# Altium PCB MB_v1.PcbDoc (part 2 of 10)
Units mm, origin at the board's own origin, x right, y up, seen from the top; angles counter-clockwise.
Board outline 203 x 72 mm, 6 copper layers (Top Layer, Layer 3, Layer 1, Layer 2, Layer 4, Bottom Layer), stack 1.52 mm thick; 655 components, 569 nets, 2943 pads, 1834 vias.
Unrouted connection lines stored in the file: 31.
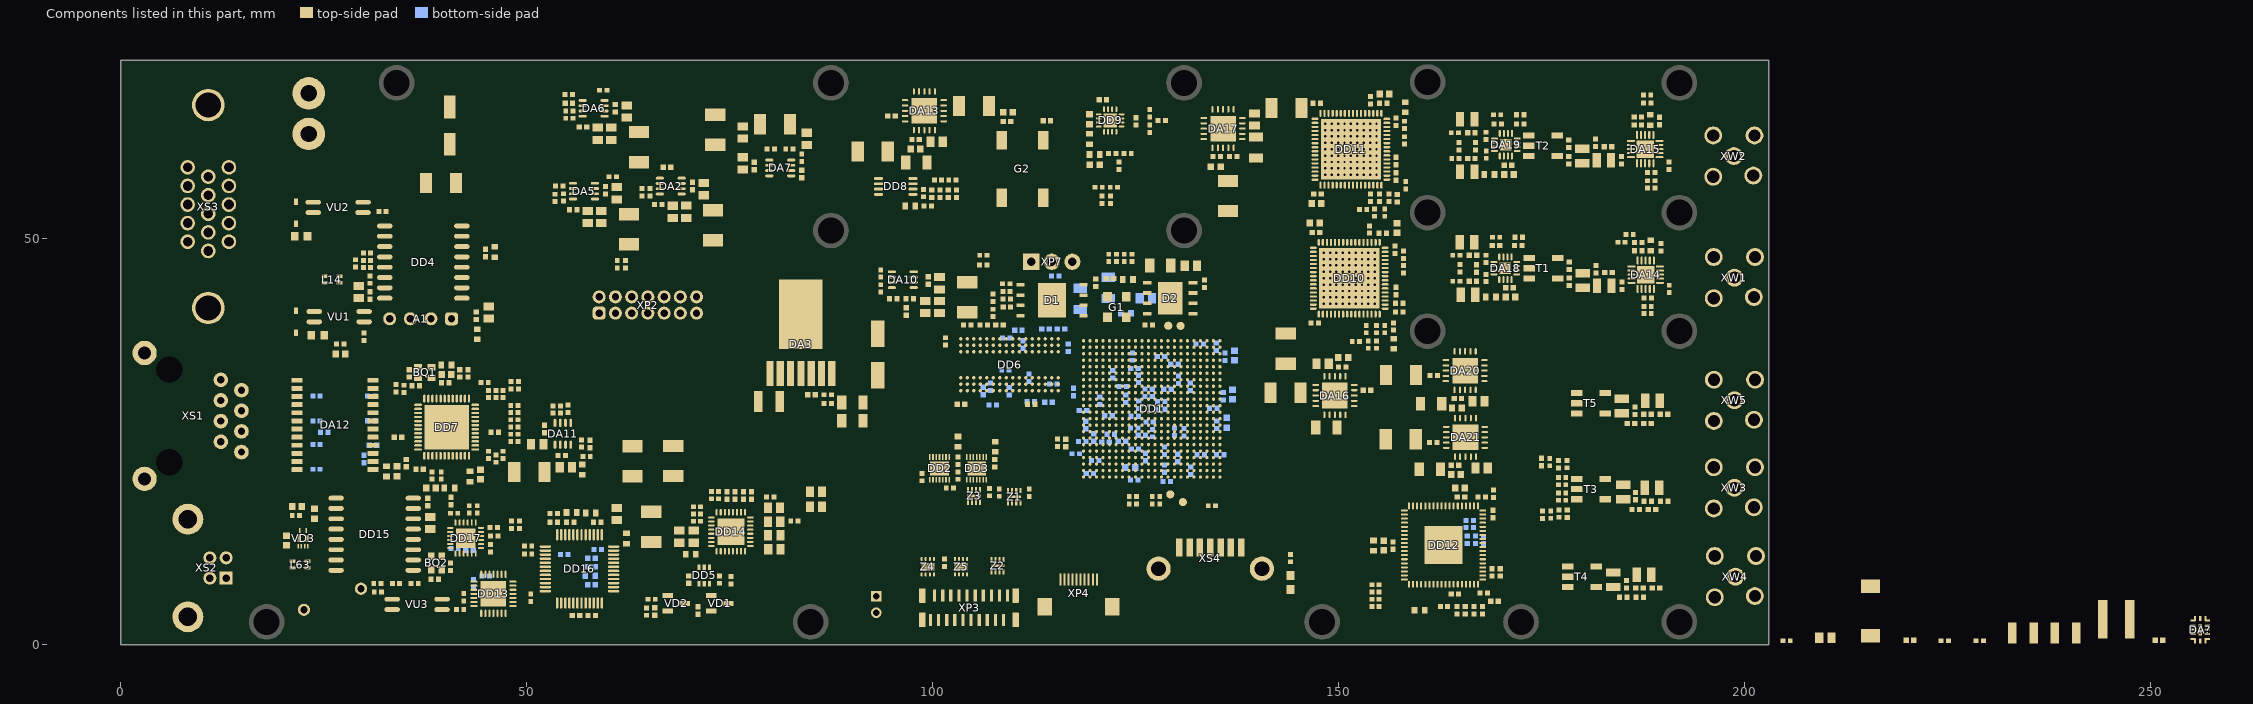
[diagram p6: the components of this part, seen from the top]

## Components (designator, comment, footprint, x,y, rotation, side; value= is the part's Value field where it differs from the comment) (continued)
XS4 "KLS1-SATA001" KLS1-SATA001 134.22,11.95 r0 top
XW1 "SMA-JR" SMA-JR 198.785,45.199 r90 top
XW2 "SMA-JR" SMA-JR 198.717,60.174 r90 top
XW3 "SMA-JR" SMA-JR 198.78,19.304 r90 top
XW4 "SMA-JR" SMA-JR 198.905,8.369 r90 top
XW5 "SMA-JR" SMA-JR 198.793,30.086 r90 top
Z1 "EClamp2394P" SON50P160X65_HS-9N 110.075,18.21 r90 top
Z2 "EClamp2394P" SON50P160X65_HS-9N 108.025,9.69 r90 top
Z3 "EClamp2394P" SON50P160X65_HS-9N 105.125,18.3 r90 top
Z4 "NUF4220MN" QFN50P200X200X80_HS-9L 99.425,9.6 r270 top
Z5 "NUF4220MN" QFN50P200X200X80_HS-9L 103.525,9.6 r270 top

## Footprints (in the part's own frame and the unit in brackets; to place one, negate y for a bottom-side part, rotate by r counter-clockwise, add the part's x,y. Pads: shape width x height; smd on the part's side, far side on the other; paste and mask are expansions set on the pad)
749020023A [mm] "24-Leads, Body 15,1x17,1mm, Pitch 1mm"
  rrect20% 1.35x0.6 smd: 1(-4.675,5.5) 2(-4.675,4.5) 3(-4.675,3.5) 4(-4.675,2.5) 5(-4.675,1.5) 6(-4.675,0.5) 7(-4.675,-0.5) 8(-4.675,-1.5) 9(-4.675,-2.5) 10(-4.675,-3.5) 11(-4.675,-4.5) 12(-4.675,-5.5) 13(4.675,-5.5) 14(4.675,-4.5) 15(4.675,-3.5) 16(4.675,-2.5) 17(4.675,-1.5) 18(4.675,-0.5) 19(4.675,0.5) 20(4.675,1.5) 21(4.675,2.5) 22(4.675,3.5) 23(4.675,4.5) 24(4.675,5.5)
  silkscreen extent -4.82,-7.55 3.55,7.55, body extent -5,-7.55 5,7.55, height 4
"ABRACOM ABM10" [mm] "Quartz Crystal, SM; Body 2.5 x 2.0 mm (LxW max)"
  rect 0.95x0.8 smd: 1(-0.825,-0.65) 2(0.825,-0.65) 3(0.825,0.65) 4(-0.825,0.65)
  silkscreen extent -1.32,-1.78 -1.07,-1.53, body extent -1.3,-1.03 1.3,1.08, height 0.7
BGA96C80P9X16_800X1400X110 [mm] "BGA, 96-Leads, Body 8,00x14,00mmx1,10mm, Pitch 0,80mm"
  round 0.42 smd mask+0.07: A1(-3.2,6) A2(-2.4,6) A3(-1.6,6) A7(1.6,6) A8(2.4,6) A9(3.2,6) B1(-3.2,5.2) B2(-2.4,5.2) B3(-1.6,5.2) B7(1.6,5.2) B8(2.4,5.2) B9(3.2,5.2) C1(-3.2,4.4) C2(-2.4,4.4) C3(-1.6,4.4) C7(1.6,4.4) C8(2.4,4.4) C9(3.2,4.4) D1(-3.2,3.6) D2(-2.4,3.6) D3(-1.6,3.6) D7(1.6,3.6) D8(2.4,3.6) D9(3.2,3.6) E1(-3.2,2.8) E2(-2.4,2.8) E3(-1.6,2.8) E7(1.6,2.8) E8(2.4,2.8) E9(3.2,2.8) F1(-3.2,2) F2(-2.4,2) F3(-1.6,2) F7(1.6,2) F8(2.4,2) F9(3.2,2) G1(-3.2,1.2) G2(-2.4,1.2) G3(-1.6,1.2) G7(1.6,1.2) G8(2.4,1.2) G9(3.2,1.2) H1(-3.2,0.4) H2(-2.4,0.4) H3(-1.6,0.4) H7(1.6,0.4) H8(2.4,0.4) H9(3.2,0.4) J1(-3.2,-0.4) J2(-2.4,-0.4) J3(-1.6,-0.4) J7(1.6,-0.4) J8(2.4,-0.4) J9(3.2,-0.4) K1(-3.2,-1.2) K2(-2.4,-1.2) K3(-1.6,-1.2) K7(1.6,-1.2) K8(2.4,-1.2) K9(3.2,-1.2) L1(-3.2,-2) L2(-2.4,-2) L3(-1.6,-2) L7(1.6,-2) L8(2.4,-2) L9(3.2,-2) M1(-3.2,-2.8) M2(-2.4,-2.8) M3(-1.6,-2.8) M7(1.6,-2.8) M8(2.4,-2.8) M9(3.2,-2.8) N1(-3.2,-3.6) N2(-2.4,-3.6) N3(-1.6,-3.6) N7(1.6,-3.6) N8(2.4,-3.6) N9(3.2,-3.6) P1(-3.2,-4.4) P2(-2.4,-4.4) P3(-1.6,-4.4) P7(1.6,-4.4) P8(2.4,-4.4) P9(3.2,-4.4) R1(-3.2,-5.2) R2(-2.4,-5.2) R3(-1.6,-5.2) R7(1.6,-5.2) R8(2.4,-5.2) R9(3.2,-5.2) T1(-3.2,-6) T2(-2.4,-6) T3(-1.6,-6) T7(1.6,-6) T8(2.4,-6) T9(3.2,-6)
  silkscreen extent -4,-7 4,7, body extent -4,-7 4,7, height 1.1
BGA484C80P22X22_1900X1900X160 [mm] "BGA, 484-Leads, Body 19,00x19,00mmx1,60mm, Pitch 0,80mm"
  round 0.4 smd: A1(-8.4,8.4) A2(-7.6,8.4) A3(-6.8,8.4) A4(-6,8.4) A5(-5.2,8.4) A6(-4.4,8.4) A7(-3.6,8.4) A8(-2.8,8.4) A9(-2,8.4) A10(-1.2,8.4) A11(-0.4,8.4) A12(0.4,8.4) A13(1.2,8.4) A14(2,8.4) A15(2.8,8.4) A16(3.6,8.4) A17(4.4,8.4) A18(5.2,8.4) A19(6,8.4) A20(6.8,8.4) A21(7.6,8.4) A22(8.4,8.4) AA1(-8.4,-7.6) AA2(-7.6,-7.6) AA3(-6.8,-7.6) AA4(-6,-7.6) AA5(-5.2,-7.6) AA6(-4.4,-7.6) AA7(-3.6,-7.6) AA8(-2.8,-7.6) AA9(-2,-7.6) AA10(-1.2,-7.6) AA11(-0.4,-7.6) AA12(0.4,-7.6) AA13(1.2,-7.6) AA14(2,-7.6) AA15(2.8,-7.6) AA16(3.6,-7.6) AA17(4.4,-7.6) AA18(5.2,-7.6) AA19(6,-7.6) AA20(6.8,-7.6) AA21(7.6,-7.6) AA22(8.4,-7.6) AB1(-8.4,-8.4) AB2(-7.6,-8.4) AB3(-6.8,-8.4) AB4(-6,-8.4) AB5(-5.2,-8.4) AB6(-4.4,-8.4) AB7(-3.6,-8.4) AB8(-2.8,-8.4) AB9(-2,-8.4) AB10(-1.2,-8.4) AB11(-0.4,-8.4) AB12(0.4,-8.4) AB13(1.2,-8.4) AB14(2,-8.4) AB15(2.8,-8.4) AB16(3.6,-8.4) AB17(4.4,-8.4) AB18(5.2,-8.4) AB19(6,-8.4) AB20(6.8,-8.4) AB21(7.6,-8.4) AB22(8.4,-8.4) B1(-8.4,7.6) B2(-7.6,7.6) B3(-6.8,7.6) B4(-6,7.6) B5(-5.2,7.6) B6(-4.4,7.6) B7(-3.6,7.6) B8(-2.8,7.6) B9(-2,7.6) B10(-1.2,7.6) B11(-0.4,7.6) B12(0.4,7.6) B13(1.2,7.6) B14(2,7.6) B15(2.8,7.6) B16(3.6,7.6) B17(4.4,7.6) B18(5.2,7.6) B19(6,7.6) B20(6.8,7.6) B21(7.6,7.6) B22(8.4,7.6) C1(-8.4,6.8) C2(-7.6,6.8) C3(-6.8,6.8) C4(-6,6.8) C5(-5.2,6.8) C6(-4.4,6.8) C7(-3.6,6.8) C8(-2.8,6.8) C9(-2,6.8) C10(-1.2,6.8) C11(-0.4,6.8) C12(0.4,6.8) C13(1.2,6.8) C14(2,6.8) C15(2.8,6.8) C16(3.6,6.8) C17(4.4,6.8) C18(5.2,6.8) C19(6,6.8) C20(6.8,6.8) C21(7.6,6.8) C22(8.4,6.8) D1(-8.4,6) D2(-7.6,6) D3(-6.8,6) D4(-6,6) D5(-5.2,6) D6(-4.4,6) D7(-3.6,6) D8(-2.8,6) D9(-2,6) D10(-1.2,6) D11(-0.4,6) D12(0.4,6) D13(1.2,6) D14(2,6) D15(2.8,6) D16(3.6,6) D17(4.4,6) D18(5.2,6) D19(6,6) D20(6.8,6) D21(7.6,6) D22(8.4,6) E1(-8.4,5.2) E2(-7.6,5.2) E3(-6.8,5.2) E4(-6,5.2) E5(-5.2,5.2) E6(-4.4,5.2) E7(-3.6,5.2) E8(-2.8,5.2) E9(-2,5.2) E10(-1.2,5.2) E11(-0.4,5.2) E12(0.4,5.2) E13(1.2,5.2) E14(2,5.2) E15(2.8,5.2) E16(3.6,5.2) E17(4.4,5.2) E18(5.2,5.2) E19(6,5.2) E20(6.8,5.2) E21(7.6,5.2) E22(8.4,5.2) F1(-8.4,4.4) F2(-7.6,4.4) F3(-6.8,4.4) F4(-6,4.4) F5(-5.2,4.4) F6(-4.4,4.4) F7(-3.6,4.4) F8(-2.8,4.4) F9(-2,4.4) F10(-1.2,4.4) F11(-0.4,4.4) F12(0.4,4.4) F13(1.2,4.4) F14(2,4.4) F15(2.8,4.4) F16(3.6,4.4) F17(4.4,4.4) F18(5.2,4.4) F19(6,4.4) F20(6.8,4.4) F21(7.6,4.4) F22(8.4,4.4) G1(-8.4,3.6) G2(-7.6,3.6) G3(-6.8,3.6) G4(-6,3.6) G5(-5.2,3.6) G6(-4.4,3.6) G7(-3.6,3.6) G8(-2.8,3.6) G9(-2,3.6) G10(-1.2,3.6) G11(-0.4,3.6) G12(0.4,3.6) G13(1.2,3.6) G14(2,3.6) G15(2.8,3.6) G16(3.6,3.6) G17(4.4,3.6) G18(5.2,3.6) G19(6,3.6) G20(6.8,3.6) G21(7.6,3.6) G22(8.4,3.6) H1(-8.4,2.8) H2(-7.6,2.8) H3(-6.8,2.8) H4(-6,2.8) H5(-5.2,2.8) H6(-4.4,2.8) H7(-3.6,2.8) H8(-2.8,2.8) H9(-2,2.8) H10(-1.2,2.8) H11(-0.4,2.8) H12(0.4,2.8) H13(1.2,2.8) H14(2,2.8) H15(2.8,2.8) H16(3.6,2.8) H17(4.4,2.8) H18(5.2,2.8) H19(6,2.8) H20(6.8,2.8) H21(7.6,2.8) H22(8.4,2.8) J1(-8.4,2) J2(-7.6,2) J3(-6.8,2) J4(-6,2) J5(-5.2,2) J6(-4.4,2) J7(-3.6,2) J8(-2.8,2) J9(-2,2) J10(-1.2,2) J11(-0.4,2) J12(0.4,2) J13(1.2,2) J14(2,2) J15(2.8,2) J16(3.6,2) J17(4.4,2) J18(5.2,2) J19(6,2) J20(6.8,2) J21(7.6,2) J22(8.4,2) K1(-8.4,1.2) K2(-7.6,1.2) K3(-6.8,1.2) K4(-6,1.2) K5(-5.2,1.2) K6(-4.4,1.2) K7(-3.6,1.2) K8(-2.8,1.2) K9(-2,1.2) K10(-1.2,1.2) K11(-0.4,1.2) K12(0.4,1.2) K13(1.2,1.2) K14(2,1.2) K15(2.8,1.2) K16(3.6,1.2) K17(4.4,1.2) K18(5.2,1.2) K19(6,1.2) K20(6.8,1.2) K21(7.6,1.2) K22(8.4,1.2) L1(-8.4,0.4) L2(-7.6,0.4) L3(-6.8,0.4) L4(-6,0.4) L5(-5.2,0.4) L6(-4.4,0.4) L7(-3.6,0.4) L8(-2.8,0.4) L9(-2,0.4) L10(-1.2,0.4) L11(-0.4,0.4) L12(0.4,0.4) L13(1.2,0.4) L14(2,0.4) L15(2.8,0.4) L16(3.6,0.4) L17(4.4,0.4) L18(5.2,0.4) L19(6,0.4) L20(6.8,0.4) L21(7.6,0.4) L22(8.4,0.4) M1(-8.4,-0.4) M2(-7.6,-0.4) M3(-6.8,-0.4) M4(-6,-0.4) M5(-5.2,-0.4) M6(-4.4,-0.4) M7(-3.6,-0.4) M8(-2.8,-0.4) M9(-2,-0.4) M10(-1.2,-0.4) M11(-0.4,-0.4) M12(0.4,-0.4) M13(1.2,-0.4) M14(2,-0.4) M15(2.8,-0.4) M16(3.6,-0.4) M17(4.4,-0.4) M18(5.2,-0.4) M19(6,-0.4) M20(6.8,-0.4) M21(7.6,-0.4) M22(8.4,-0.4) N1(-8.4,-1.2) N2(-7.6,-1.2) N3(-6.8,-1.2) N4(-6,-1.2) N5(-5.2,-1.2) N6(-4.4,-1.2) N7(-3.6,-1.2) N8(-2.8,-1.2) N9(-2,-1.2) N10(-1.2,-1.2) N11(-0.4,-1.2) N12(0.4,-1.2) N13(1.2,-1.2) N14(2,-1.2) N15(2.8,-1.2) N16(3.6,-1.2) N17(4.4,-1.2) N18(5.2,-1.2) N19(6,-1.2) N20(6.8,-1.2) N21(7.6,-1.2) N22(8.4,-1.2) P1(-8.4,-2) P2(-7.6,-2) P3(-6.8,-2) P4(-6,-2) P5(-5.2,-2) P6(-4.4,-2) P7(-3.6,-2) P8(-2.8,-2) P9(-2,-2) P10(-1.2,-2) P11(-0.4,-2) P12(0.4,-2) P13(1.2,-2) P14(2,-2) P15(2.8,-2) P16(3.6,-2) P17(4.4,-2) P18(5.2,-2) P19(6,-2) P20(6.8,-2) P21(7.6,-2) P22(8.4,-2) R1(-8.4,-2.8) R2(-7.6,-2.8) R3(-6.8,-2.8) R4(-6,-2.8) R5(-5.2,-2.8) R6(-4.4,-2.8) R7(-3.6,-2.8) R8(-2.8,-2.8) R9(-2,-2.8) R10(-1.2,-2.8) R11(-0.4,-2.8) R12(0.4,-2.8) R13(1.2,-2.8) R14(2,-2.8) R15(2.8,-2.8) R16(3.6,-2.8) R17(4.4,-2.8) R18(5.2,-2.8) R19(6,-2.8) R20(6.8,-2.8) R21(7.6,-2.8) R22(8.4,-2.8) T1(-8.4,-3.6) T2(-7.6,-3.6) T3(-6.8,-3.6) T4(-6,-3.6) T5(-5.2,-3.6) T6(-4.4,-3.6) T7(-3.6,-3.6) T8(-2.8,-3.6) T9(-2,-3.6) T10(-1.2,-3.6) T11(-0.4,-3.6) T12(0.4,-3.6) T13(1.2,-3.6) T14(2,-3.6) T15(2.8,-3.6) T16(3.6,-3.6) T17(4.4,-3.6) T18(5.2,-3.6) T19(6,-3.6) T20(6.8,-3.6) T21(7.6,-3.6) T22(8.4,-3.6) U1(-8.4,-4.4) U2(-7.6,-4.4) U3(-6.8,-4.4) U4(-6,-4.4) U5(-5.2,-4.4) U6(-4.4,-4.4) U7(-3.6,-4.4) U8(-2.8,-4.4) U9(-2,-4.4) U10(-1.2,-4.4) U11(-0.4,-4.4) U12(0.4,-4.4) U13(1.2,-4.4) U14(2,-4.4) U15(2.8,-4.4) U16(3.6,-4.4) U17(4.4,-4.4) U18(5.2,-4.4) U19(6,-4.4) U20(6.8,-4.4) U21(7.6,-4.4) U22(8.4,-4.4) V1(-8.4,-5.2) V2(-7.6,-5.2) V3(-6.8,-5.2) V4(-6,-5.2) V5(-5.2,-5.2) V6(-4.4,-5.2) V7(-3.6,-5.2) V8(-2.8,-5.2) V9(-2,-5.2) V10(-1.2,-5.2) V11(-0.4,-5.2) V12(0.4,-5.2) V13(1.2,-5.2) V14(2,-5.2) V15(2.8,-5.2) V16(3.6,-5.2) V17(4.4,-5.2) V18(5.2,-5.2) V19(6,-5.2) V20(6.8,-5.2) V21(7.6,-5.2) V22(8.4,-5.2) W1(-8.4,-6) W2(-7.6,-6) W3(-6.8,-6) W4(-6,-6) W5(-5.2,-6) W6(-4.4,-6) W7(-3.6,-6) W8(-2.8,-6) W9(-2,-6) W10(-1.2,-6) W11(-0.4,-6) W12(0.4,-6) W13(1.2,-6) W14(2,-6) W15(2.8,-6) W16(3.6,-6) W17(4.4,-6) W18(5.2,-6) W19(6,-6) W20(6.8,-6) W21(7.6,-6) W22(8.4,-6) Y1(-8.4,-6.8) Y2(-7.6,-6.8) Y3(-6.8,-6.8) Y4(-6,-6.8) Y5(-5.2,-6.8) Y6(-4.4,-6.8) Y7(-3.6,-6.8) Y8(-2.8,-6.8) Y9(-2,-6.8) Y10(-1.2,-6.8) Y11(-0.4,-6.8) Y12(0.4,-6.8) Y13(1.2,-6.8) Y14(2,-6.8) Y15(2.8,-6.8) Y16(3.6,-6.8) Y17(4.4,-6.8) Y18(5.2,-6.8) Y19(6,-6.8) Y20(6.8,-6.8) Y21(7.6,-6.8) Y22(8.4,-6.8)
  silkscreen extent -10.27,-9.5 9.5,9.5, body extent -9.5,-9.5 9.5,9.5, height 1.6
CAPAE7266X61N [mm] "Aluminum Electrolytic Capacitor, Body 6,60x6,60x6,10mm, IPC Medium Density"
  rect 3.25x1.65 smd: 1(-2.575,0) 2(2.575,0)
  silkscreen extent -3.4,-3.4 3.4,3.4, body extent -3.6,-3.4 3.6,3.4, height 6.1
CAPAE7664X77L [mm] "Aluminum Electrolytic Capacitor, Body 6,35x6,35x7,70mm, IPC High Density"
  rect 2.8x1.4 smd: 1(-2.3,0) 2(2.3,0)
  silkscreen extent -3.3,-3.3 3.3,3.3, body extent -3.5,-3.3 3.5,3.3, height 7.71
CAPC1005X06N [mm] "Chip Capacitor, 2-Leads, Body 1,00x0,50mm, IPC Medium Density"
  rect 0.64x0.64 smd mask+0.05: 1(-0.46,0) 2(0.46,0)
  body extent -0.55,-0.3 0.55,0.3, height 0.6
CAPC1608X08L [mm] "Chip Capacitor, 2-Leads, Body 1,60x0,80mm, IPC High Density"
  rect 0.8x0.85 smd mask+0.08: 1(-0.6,0) 2(0.6,0)
  body extent -0.85,-0.45 0.85,0.45, height 0.8
CAPC2012X12L [mm] "Chip Capacitor, 2-Leads, Body 2,00x1,25mm, IPC High Density"
  rect 1x1.3 smd mask+0.05: 1(-0.75,0) 2(0.75,0)
  body extent -1.05,-0.67 1.05,0.67, height 1.25
CAPC3216X19L [mm] "Chip Capacitor, 2-Leads, Body 3,20x1,60mm, IPC High Density"
  rect 1.15x1.7 smd: 1(-1.3,0) 2(1.3,0)
  silkscreen extent -0.35,-0.75 0.35,0.75, body extent -1.68,-0.87 1.68,0.87, height 1.9
CAPC3225X27L [mm] "Chip Capacitor, 2-Leads, Body 3,20x2,50mm, IPC High Density"
  rect 1.05x2.55 smd: 1(-1.325,0) 2(1.325,0)
  silkscreen extent -0.4,-1.17 0.4,1.18, body extent -1.6,-1.25 1.6,1.25, height 2.7
CAPMP7343X28L [mm] "Molded Capacitor, 2-Leads, Body 7.30x4.30mm, IPC High Density"
  rect 1.7x2.35 smd: 1(3.05,0) 2(-3.05,0)
  silkscreen extent -3.9,-2.4 4.62,2.4, body extent -3.8,-2.3 3.8,2.3, height 3.1
CAPRD7.5-9X5 [mm] "Capacitor, Ceramic, Thru-Hole, Disc; Body 9 x 5 mm (LxW max) Pin Spacing 7.5 mm (typ)"
  round 1.5 hole 0.9: 1(-3.517,-1.3) 2(3.517,1.3)
  silkscreen extent -4.5,-2.5 4.5,2.5, body extent -4.3,-1.6 4.2,1.6, height 10.25
CD1608-0603_GREEN [mm] "Chip Diode; Body 1.6 x 0.8 mm (LxW typ)"
  rect 1.1x1 smd: 1(-0.85,0) 2(0.85,0)
  silkscreen extent 1.7,-0.4 1.7,0.4, body extent -0.81,-0.4 0.81,0.4, height 0.6
Coilcraft-XAL5030 [mm]
  rect 1.18x4.7 smd: 1(-1.655,0) 2(1.655,0)
  silkscreen extent -2.88,-2.97 2.86,2.99, body extent -2.74,-2.84 2.74,2.84, height 3.1
CSAB0420 [mm] "Wire Wound Inductor, 2-Leads,"
  rect 1.5x2.5 smd: 1(-1.85,0) 2(1.85,0)
  silkscreen extent -2.4,-2.3 2.4,2.2, body extent -2.35,-2.1 2.35,2.1, height 1.85
"CVHD-950 Model" [mm]
  rect 1.27x2.28 smd: 1(-2.54,-3.555) 2(2.54,-3.555) 3(2.54,3.555) 4(-2.54,3.555)
  silkscreen extent -7.3,-5.62 7.3,5, body extent -7.1,-4.58 7.1,4.58, height 5.3
DS1038-15F [mm]
  round 1.8 hole 1.2: 1(4.33,2.54) 2(2.04,2.54) 3(-0.25,2.54) 4(-2.54,2.54) 5(-4.83,2.54) 6(5.475,0) 7(3.185,0) 8(0.895,0) 9(-1.395,0) 10(-3.685,0) 11(4.33,-2.54) 12(2.04,-2.54) 13(-0.25,-2.54) 14(-2.54,-2.54) 15(-4.83,-2.54)
  round 4 hole 3.1: 16(-12.5,0) 16(12.495,0)
  silkscreen extent -15.43,-11.17 15.43,6.6, body extent -15.37,-16.99 15.47,4.93, height 12.5
EXC34CE900U [mm]
  rect 0.4x0.75 smd: 1(-0.4,-0.925) 2(-0.4,0.925) 3(0.4,0.925) 4(0.4,-0.925)
  silkscreen extent -0.45,-1.8 -0.35,-1.7, body extent -0.63,-1.01 0.63,1.01, height 0.6
FH12-10S-0.5SH [mm] "FFC/FPC Connector 10 Circuits"
  rect 1.8x2.2 smd mask+0.051: 0(-4.15,-3.35) 0(4.15,-3.35)
  rect 0.25x1.5 smd mask+0.051: 1(-2.25,0) 2(-1.75,0) 3(-1.25,0) 4(-0.75,0) 5(-0.25,0) 6(0.25,0) 7(0.75,0) 8(1.25,0) 9(1.75,0) 10(2.25,0)
  silkscreen extent -5.35,-6.95 5.35,1.02, body extent -4.55,-6.35 4.55,0.05, height 2.14
FH12-20S-0.5SVA [mm] "FPC CONN. 0.5MM PITCH, 20P, Vertical"
  rrect20% 0.8x1.8 smd mask+0.05: 0(-5.75,-1.5) 0(-5.75,1.5) 0(5.75,-1.5) 0(5.75,1.5)
  rect 0.4x1.5 smd mask+0.05: 1(4.75,1.5) 2(4.25,-1.5) 3(3.75,1.5) 4(3.25,-1.5) 5(2.75,1.5) 6(2.25,-1.5) 7(1.75,1.5) 8(1.25,-1.5) 9(0.75,1.5) 10(0.25,-1.5) 11(-0.25,1.5) 12(-0.75,-1.5) 13(-1.25,1.5) 14(-1.75,-1.5) 15(-2.25,1.5) 16(-2.75,-1.5) 17(-3.25,1.5) 18(-3.75,-1.5) 19(-4.25,1.5) 20(-4.75,-1.5)
  silkscreen extent -6.9,-2.7 6.9,2.8, body extent -6.7,-1.9 6.7,1.9, height 5.5
FUSC1607X85N [mm]
  rect 0.94x1.01 smd: 1(-0.79,0) 2(0.79,0)
  silkscreen extent 0,-0.26 0,0.26, body extent -0.8,-0.36 0.8,0.36, height 0.85
IDC2-14MS [mm]
  rrect50% 1.6x1.6 hole 0.9: 1(0,0)
  round 1.6 hole 0.9: 2(2,0) 3(0,-2) 4(2,-2) 5(0,-4) 6(2,-4) 7(0,-6) 8(2,-6) 9(0,-8) 10(2,-8) 11(0,-10) 12(2,-10) 13(0,-12) 14(2,-12)
  silkscreen extent -4.2,-18.4 4.9,6.4, body extent -2.2,-17.98 4.51,5.98, height 5
INDC0805CS [mm] "Chip Inductor, 2-Leads, Body 2.29x1.73mm, IPC High Density"
  rect 1.02x1.78 smd: 1(-0.89,0) 2(0.89,0)
  silkscreen extent -0.2,-0.78 0.2,0.78, body extent -1.14,-0.86 1.14,0.86, height 1.51
INDC1608X08L [mm] "Chip Inductor, 2-Leads, Body 1,60x0,80mm, IPC High Density"
  rect 0.69x0.84 smd: 1(-0.63,0) 2(0.63,0)
  body extent -0.8,-0.4 0.8,0.4, height 0.95
KLS1-SATA001 [mm]
  rect 0.8x2.2 smd mask+0.05: 1(-3.81,0) 2(-2.54,0) 3(-1.27,0) 4(0,0) 5(1.27,0) 6(2.54,0) 7(3.81,0)
  round 3 hole 1.8: 4(-6.37,-2.6) 4(6.37,-2.6)
  silkscreen extent -9.43,-11.02 8.35,1.12, body extent -9.27,-10.96 8.27,0.61, height 5.82
KLS12-107L [mm] "Modular Jack"
  round 0 hole 3.25 unplated: 0(-5.715,0) 0(5.715,0)
  round 1.8 hole 0.9: 1(-4.445,6.35) 2(-3.175,8.89) 3(-1.905,6.35) 4(-0.635,8.89) 5(0.635,6.35) 6(1.905,8.89) 7(3.175,6.35) 8(4.445,8.89)
  round 3 hole 1.6: 9(-7.75,-3.05) 9(7.75,-3.05)
  silkscreen extent -9.77,-10.75 9.7,10.42, body extent -7.66,-8.04 7.66,10.12, height 12.29
LFCSP_VQ_72 [mm] "QFN, 72-Leads, Body 10,00x10,00mm, Pitch 0,50mm, Thermal Pad 4,70x4,70mm, IPC High Density"
  oval 0.85x0.25 smd mask+0.05: 1(-4.825,4.25) 2(-4.825,3.75) 3(-4.825,3.25) 4(-4.825,2.75) 5(-4.825,2.25) 6(-4.825,1.75) 7(-4.825,1.25) 8(-4.825,0.75) 9(-4.825,0.25) 10(-4.825,-0.25) 11(-4.825,-0.75) 12(-4.825,-1.25) 13(-4.825,-1.75) 14(-4.825,-2.25) 15(-4.825,-2.75) 16(-4.825,-3.25) 17(-4.825,-3.75) 18(-4.825,-4.25) 37(4.825,-4.25) 38(4.825,-3.75) 39(4.825,-3.25) 40(4.825,-2.75) 41(4.825,-2.25) 42(4.825,-1.75) 43(4.825,-1.25) 44(4.825,-0.75) 45(4.825,-0.25) 46(4.825,0.25) 47(4.825,0.75) 48(4.825,1.25) 49(4.825,1.75) 50(4.825,2.25) 51(4.825,2.75) 52(4.825,3.25) 53(4.825,3.75) 54(4.825,4.25)
  oval 0.25x0.85 smd mask+0.05: 19(-4.25,-4.825) 20(-3.75,-4.825) 21(-3.25,-4.825) 22(-2.75,-4.825) 23(-2.25,-4.825) 24(-1.75,-4.825) 25(-1.25,-4.825) 26(-0.75,-4.825) 27(-0.25,-4.825) 28(0.25,-4.825) 29(0.75,-4.825) 30(1.25,-4.825) 31(1.75,-4.825) 32(2.25,-4.825) 33(2.75,-4.825) 34(3.25,-4.825) 35(3.75,-4.825) 36(4.25,-4.825) 55(4.25,4.825) 56(3.75,4.825) 57(3.25,4.825) 58(2.75,4.825) 59(2.25,4.825) 60(1.75,4.825) 61(1.25,4.825) 62(0.75,4.825) 63(0.25,4.825) 64(-0.25,4.825) 65(-0.75,4.825) 66(-1.25,4.825) 67(-1.75,4.825) 68(-2.25,4.825) 69(-2.75,4.825) 70(-3.25,4.825) 71(-3.75,4.825) 72(-4.25,4.825)
  rect 4.7x4.7 smd mask+0.05: 73(0,0)
  silkscreen extent -6.72,-5.2 5.2,5.2, body extent -5.05,-5.05 5.05,5.05, height 1
PIN2_PROBE [mm] "Для пробника"
  round 1 smd: 1(0,0)
"PLS-3 (DS1021-1x3)" [mm]
  rect 2x2 hole 1.02: 1(0,0)
  round 2 hole 1.02: 2(0,-2.54) 3(0,-5.08)
  silkscreen extent -1.8,-6.9 1.8,1.7, body extent -1.24,-6.35 1.3,1.27, height 7.81
QFN50P200X200X80_HS-9L [mm] "QFN, 8-Leads, Body 2,00x2,00mm, Pitch 0,50mm, Thermal Pad 0,90x1,60mm, IPC High Density"
  oval 0.5x0.25 smd mask+0.07: 1(-0.95,0.75) 2(-0.95,0.25) 3(-0.95,-0.25) 4(-0.95,-0.75) 5(0.95,-0.75) 6(0.95,-0.25) 7(0.95,0.25) 8(0.95,0.75)
  rect 0.9x1.6 smd: 9(0,0)
  silkscreen extent -1.62,1.38 -1.38,1.63, body extent -1.13,-1.05 1.13,1.05, height 0.8
QFN50P300X300X75_HS-17L [mm] "QFN, 16-Leads, Body 3.00x3.00mm, Pitch 0.50mm, Thermal Pad 1.45x1.45mm, IPC High Density"
  oval 0.85x0.25 smd mask+0.05: 1(-1.4,0.75) 2(-1.4,0.25) 3(-1.4,-0.25) 4(-1.4,-0.75) 9(1.4,-0.75) 10(1.4,-0.25) 11(1.4,0.25) 12(1.4,0.75)
  oval 0.25x0.85 smd mask+0.05: 5(-0.75,-1.4) 6(-0.25,-1.4) 7(0.25,-1.4) 8(0.75,-1.4) 13(0.75,1.4) 14(0.25,1.4) 15(-0.25,1.4) 16(-0.75,1.4)
  rect 1.45x1.45 smd mask+0.05: 17(0,0)
  silkscreen extent -2.47,-1.7 1.7,1.7, body extent -1.57,-1.57 1.57,1.57, height 0.75
QFN50P300X300X100_HS-17L [mm] "QFN, 16-Leads, Body 3,00x3,00mm, Pitch 0,50mm, Thermal Pad 1,70x1,70mm, IPC High Density"
  oval 0.7x0.25 smd mask+0.05: 1(-1.4,0.75) 2(-1.4,0.25) 3(-1.4,-0.25) 4(-1.4,-0.75) 9(1.4,-0.75) 10(1.4,-0.25) 11(1.4,0.25) 12(1.4,0.75)
  oval 0.25x0.7 smd mask+0.05: 5(-0.75,-1.4) 6(-0.25,-1.4) 7(0.25,-1.4) 8(0.75,-1.4) 13(0.75,1.4) 14(0.25,1.4) 15(-0.25,1.4) 16(-0.75,1.4)
  rect 1.7x1.7 smd paste-0.075 mask+0.05: 17(0,0)
  silkscreen extent -2.47,-1.7 1.7,1.7, body extent -1.6,-1.6 1.6,1.6, height 1
QFN50P400X400X80_HS-21L [mm] "QFN, 20-Leads, Body 4,00x4,00mm, Pitch 0,50mm, Thermal Pad 2,15x2,15mm, IPC High Density"
  oval 1x0.25 smd mask+0.05: 1(-1.75,1) 2(-1.75,0.5) 3(-1.75,0) 4(-1.75,-0.5) 5(-1.75,-1) 11(1.75,-1) 12(1.75,-0.5) 13(1.75,0) 14(1.75,0.5) 15(1.75,1)
  oval 0.25x1 smd mask+0.05: 6(-1,-1.75) 7(-0.5,-1.75) 8(0,-1.75) 9(0.5,-1.75) 10(1,-1.75) 16(1,1.75) 17(0.5,1.75) 18(0,1.75) 19(-0.5,1.75) 20(-1,1.75)
  rect 2.15x2.15 smd mask+0.05: 21(0,0)
  silkscreen extent -2.98,-2.2 2.2,2.2, body extent -2.01,-1.98 1.99,2.02, height 1
QFN50P400X400X80_HS-25L [mm] "QFN, 24-Leads, Body 4.00x4.00mm, Pitch 0.50mm, Thermal Pad 2.45x2.45mm, IPC High Density"
  oval 0.76x0.23 smd mask+0.05: 1(-1.9,1.25) 2(-1.9,0.75) 3(-1.9,0.25) 4(-1.9,-0.25) 5(-1.9,-0.75) 6(-1.9,-1.25) 13(1.9,-1.25) 14(1.9,-0.75) 15(1.9,-0.25) 16(1.9,0.25) 17(1.9,0.75) 18(1.9,1.25)
  oval 0.23x0.76 smd mask+0.05: 7(-1.25,-1.9) 8(-0.75,-1.9) 9(-0.25,-1.9) 10(0.25,-1.9) 11(0.75,-1.9) 12(1.25,-1.9) 19(1.25,1.9) 20(0.75,1.9) 21(0.25,1.9) 22(-0.25,1.9) 23(-0.75,1.9) 24(-1.25,1.9)
  rect 2.4x2.4 smd mask+0.05: 25(0,0)
  silkscreen extent -2.2,-2.2 2.2,2.2, body extent -2,-2 2,2, height 1
QFN50P500X500X80_HS-29N [mm] "QFN, 28-Leads, Body 5,00x5,00mm, Pitch 0,50mm, Thermal Pad 3,13x3,13mm, IPC Medium Density"
  oval 0.9x0.25 smd: 1(-2.4,1.5) 2(-2.4,1) 3(-2.4,0.5) 4(-2.4,0) 5(-2.4,-0.5) 6(-2.4,-1) 7(-2.4,-1.5) 15(2.4,-1.5) 16(2.4,-1) 17(2.4,-0.5) 18(2.4,0) 19(2.4,0.5) 20(2.4,1) 21(2.4,1.5)
  oval 0.25x0.9 smd: 8(-1.5,-2.4) 9(-1,-2.4) 10(-0.5,-2.4) 11(0,-2.4) 12(0.5,-2.4) 13(1,-2.4) 14(1.5,-2.4) 22(1.5,2.4) 23(1,2.4) 24(0.5,2.4) 25(0,2.4) 26(-0.5,2.4) 27(-1,2.4) 28(-1.5,2.4)
  rect 3.13x3.13 smd: 29(0,0)
  silkscreen extent -3.42,-2.65 2.65,2.65, body extent -2.51,-2.51 2.51,2.51, height 0.8
QFN50P500X500X100_HS-33L [mm] "QFN, 32-Leads, Body 5.00x5.00mm, Pitch 0.50mm, Thermal Pad 3.30x3.30mm, IPC High Density"
  oval 0.8x0.25 smd mask+0.05: 1(-2.4,1.75) 2(-2.4,1.25) 3(-2.4,0.75) 4(-2.4,0.25) 5(-2.4,-0.25) 6(-2.4,-0.75) 7(-2.4,-1.25) 8(-2.4,-1.75) 17(2.4,-1.75) 18(2.4,-1.25) 19(2.4,-0.75) 20(2.4,-0.25) 21(2.4,0.25) 22(2.4,0.75) 23(2.4,1.25) 24(2.4,1.75)
  oval 0.25x0.8 smd mask+0.05: 9(-1.75,-2.4) 10(-1.25,-2.4) 11(-0.75,-2.4) 12(-0.25,-2.4) 13(0.25,-2.4) 14(0.75,-2.4) 15(1.25,-2.4) 16(1.75,-2.4) 25(1.75,2.4) 26(1.25,2.4) 27(0.75,2.4) 28(0.25,2.4) 29(-0.25,2.4) 30(-0.75,2.4) 31(-1.25,2.4) 32(-1.75,2.4)
  rect 3.3x3.3 smd mask+0.05: 33(0,0)
  silkscreen extent -2.58,2.58 -2.33,2.83, body extent -2.57,-2.57 2.57,2.57, height 1
QFN50P700X700-48V6M [mm] "QFN, 48-Leads, Body 7x7mm, Pitch 0.5mm, IPC Low Density"
  oval 0.95x0.3 smd: 1(-3.525,2.75) 2(-3.525,2.25) 3(-3.525,1.75) 4(-3.525,1.25) 5(-3.525,0.75) 6(-3.525,0.25) 7(-3.525,-0.25) 8(-3.525,-0.75) 9(-3.525,-1.25) 10(-3.525,-1.75) 11(-3.525,-2.25) 12(-3.525,-2.75) 25(3.525,-2.75) 26(3.525,-2.25) 27(3.525,-1.75) 28(3.525,-1.25) 29(3.525,-0.75) 30(3.525,-0.25) 31(3.525,0.25) 32(3.525,0.75) 33(3.525,1.25) 34(3.525,1.75) 35(3.525,2.25) 36(3.525,2.75)
  oval 0.3x0.95 smd: 13(-2.75,-3.525) 14(-2.25,-3.525) 15(-1.75,-3.525) 16(-1.25,-3.525) 17(-0.75,-3.525) 18(-0.25,-3.525) 19(0.25,-3.525) 20(0.75,-3.525) 21(1.25,-3.525) 22(1.75,-3.525) 23(2.25,-3.525) 24(2.75,-3.525) 37(2.75,3.525) 38(2.25,3.525) 39(1.75,3.525) 40(1.25,3.525) 41(0.75,3.525) 42(0.25,3.525) 43(-0.25,3.525) 44(-0.75,3.525) 45(-1.25,3.525) 46(-1.75,3.525) 47(-2.25,3.525) 48(-2.75,3.525)
  rect 5.5x5.5 smd: 49(0,0)
  silkscreen extent -4.67,-3.6 3.6,3.6, body extent -3.51,-3.51 3.51,3.51, height 0.78
QFN50P900X900X100_HS-65L [mm] "QFN, 64-Leads, Body 9,00x9,00mm, Pitch 0,50mm, Thermal Pad 7,40x7,40mm, IPC High Density"
  oval 0.85x0.28 smd mask+0.07: 1(-4.425,3.75) 2(-4.425,3.25) 3(-4.425,2.75) 4(-4.425,2.25) 5(-4.425,1.75) 6(-4.425,1.25) 7(-4.425,0.75) 8(-4.425,0.25) 9(-4.425,-0.25) 10(-4.425,-0.75) 11(-4.425,-1.25) 12(-4.425,-1.75) 13(-4.425,-2.25) 14(-4.425,-2.75) 15(-4.425,-3.25) 16(-4.425,-3.75) 33(4.425,-3.75) 34(4.425,-3.25) 35(4.425,-2.75) 36(4.425,-2.25) 37(4.425,-1.75) 38(4.425,-1.25) 39(4.425,-0.75) 40(4.425,-0.25) 41(4.425,0.25) 42(4.425,0.75) 43(4.425,1.25) 44(4.425,1.75) 45(4.425,2.25) 46(4.425,2.75) 47(4.425,3.25) 48(4.425,3.75)
  oval 0.28x0.85 smd mask+0.07: 17(-3.75,-4.425) 18(-3.25,-4.425) 19(-2.75,-4.425) 20(-2.25,-4.425) 21(-1.75,-4.425) 22(-1.25,-4.425) 23(-0.75,-4.425) 24(-0.25,-4.425) 25(0.25,-4.425) 26(0.75,-4.425) 27(1.25,-4.425) 28(1.75,-4.425) 29(2.25,-4.425) 30(2.75,-4.425) 31(3.25,-4.425) 32(3.75,-4.425) 49(3.75,4.425) 50(3.25,4.425) 51(2.75,4.425) 52(2.25,4.425) 53(1.75,4.425) 54(1.25,4.425) 55(0.75,4.425) 56(0.25,4.425) 57(-0.25,4.425) 58(-0.75,4.425) 59(-1.25,4.425) 60(-1.75,4.425) 61(-2.25,4.425) 62(-2.75,4.425) 63(-3.25,4.425) 64(-3.75,4.425)
  round 0.5 / inner round 0.6 / far side round 0.508 hole 0.3: 65(-3.15,1.575) 65(-3.15,2.362) 65(-3.15,3.15) 65(-3.15,-0.787) 65(-3.15,0) 65(-3.15,0.787) 65(-3.15,-3.15) 65(-3.15,-2.362) 65(-3.15,-1.575) 65(-2.362,1.575) 65(-2.362,2.362) 65(-2.362,3.15) 65(-2.362,-0.787) 65(-2.362,0) 65(-2.362,0.787) 65(-2.362,-3.15) 65(-2.362,-2.362) 65(-2.362,-1.575) 65(-1.575,2.362) 65(-1.575,3.15) 65(-1.575,0.787) 65(-1.575,1.575) 65(-1.575,0) 65(-1.575,-1.575) 65(-1.575,-0.787) 65(-1.575,-3.15) 65(-1.575,-2.362) 65(-0.787,3.15) 65(-0.787,2.362) 65(-0.787,1.575) 65(-0.787,0.787) 65(-0.787,0) 65(-0.787,-0.787) 65(-0.787,-1.575) 65(-0.787,-2.362) 65(-0.787,-3.15) 65(0,3.15) 65(0,2.362) 65(0,1.575) 65(0,0.787) 65(0,0) 65(0,-0.787) 65(0,-1.575) 65(0,-2.362) 65(0,-3.15) 65(0.787,3.15) 65(0.787,2.362) 65(0.787,1.575) 65(0.787,0.787) 65(0.787,0) 65(0.787,-0.787) 65(0.787,-1.575) 65(0.787,-2.362) 65(0.787,-3.15) 65(1.575,2.362) 65(1.575,3.15) 65(1.575,0.787) 65(1.575,1.575) 65(1.575,0) 65(1.575,-1.575) 65(1.575,-0.787) 65(1.575,-3.15) 65(1.575,-2.362) 65(2.362,1.575) 65(2.362,2.362) 65(2.362,3.15) 65(2.362,-0.787) 65(2.362,0) 65(2.362,0.787) 65(2.362,-3.15) 65(2.362,-2.362) 65(2.362,-1.575) 65(3.15,1.575) 65(3.15,2.362) 65(3.15,3.15) 65(3.15,-0.787) 65(3.15,0) 65(3.15,0.787) 65(3.15,-3.15) 65(3.15,-2.362) 65(3.15,-1.575)
  rect 7.4x7.4 smd paste-3.7: 65(0,0)
  silkscreen extent -5.58,-4.72 4.72,4.92, body extent -4.5,-4.5 4.5,4.5, height 0.82
QFN65P500X500X100_HS-21L [mm] "QFN, 20-Leads, Body 5,00x5,00mm, Pitch 0,65mm, Thermal Pad 3,15x3,15mm, IPC High Density"
  oval 0.8x0.25 smd mask+0.07: 1(-2.375,1.3) 2(-2.375,0.65) 3(-2.375,0) 4(-2.375,-0.65) 5(-2.375,-1.3) 11(2.375,-1.3) 12(2.375,-0.65) 13(2.375,0) 14(2.375,0.65) 15(2.375,1.3)
  oval 0.25x0.8 smd mask+0.07: 6(-1.3,-2.375) 7(-0.65,-2.375) 8(0,-2.375) 9(0.65,-2.375) 10(1.3,-2.375) 16(1.3,2.375) 17(0.65,2.375) 18(0,2.375) 19(-0.65,2.375) 20(-1.3,2.375)
  rect 3.15x3.15 smd mask+0.07: 21(0,0)
  silkscreen extent -3.5,-2.73 2.73,2.72, body extent -2.66,-2.66 2.66,2.66, height 1
RESC1005X06N [mm] "Chip Resistor, 2-Leads, Body 1,00x0,50mm, IPC Medium Density"
  rect 0.6x0.6 smd mask+0.05: 1(-0.45,0) 2(0.45,0)
  body extent -0.55,-0.3 0.55,0.3, height 0.6
"SERIES AM1/4S-Z" [mm]
  rrect50% 1.6x1.6 hole 0.9: 1(0,0)
  round 1.6 hole 0.9: 2(2.54,0) 3(5.08,0) 4(7.62,0)
  silkscreen extent -2.96,-2.17 9.7,4.9, body extent -2.1,-1.2 9.58,4.8, height 10.15
SLP2018P6 [mm]
  rect 0.6x0.18 smd mask+0.05: 1(-0.975,0.6) 2(-0.975,0.2) 3(-0.975,-0.2) 4(-0.975,-0.6)
  rect 0.84x0.45 smd mask+0.08: 5(0,0.475) 5(0,-0.475)
  rect 0.6x0.2 smd mask+0.08: 5(0.975,-0.4) 5(0.975,0.4)
  silkscreen extent -1.25,-1.1 0.9,1.15, body extent -0.9,-1 0.9,1, height 0.58
"SM-22 PACKAGE" [mm] "SM22, 5-Leads, Body 3,81x3,81mm, Pitch 1,25mm, IPC High Density"
  rect 1.4x0.76 smd: 1(-1.77,-1.25) 2(-1.77,0) 3(-1.77,1.25) 4(1.77,1.25) 5(1.77,-1.25)
  silkscreen extent -1.9,-2.28 0.76,1.9, body extent -2.41,-1.9 2.41,1.91, height 2.6
SMA-JR [mm] "Connector; RF Coaxial, SMA, SM; 5 Position; Vertical - Large Pad Version"
  round 2.2 hole 1.5: 1(0,0) 2(-2.54,2.54) 2(-2.4,-2.4) 2(2.54,-2.54) 2(2.54,2.54)
  silkscreen extent -3.17,-3.17 3.17,3.17, body extent -3.5,-11.6 3.5,3.5, height 10.16
SO4-170-1.27 [mm] "SO4-170-1.27  7mm x 2.6mm  4pins"
  oval 1.9x0.6 smd: 1(-3.075,0.635) 2(-3.075,-0.635) 3(3.075,-0.635) 4(3.075,0.635)
  silkscreen extent -2.2,-1.3 2.2,1.3, body extent -3.5,-1.3 3.5,1.3, height 2
SOIC127P1030X265-16N [mm] "SOIC, 16-Leads, Body 10,30x7,50mm, Pitch 1,27mm, IPC Medium Density"
  oval 1.9x0.6 smd: 1(-4.75,4.445) 2(-4.75,3.175) 3(-4.75,1.905) 4(-4.75,0.635) 5(-4.75,-0.635) 6(-4.75,-1.905) 7(-4.75,-3.175) 8(-4.75,-4.445) 9(4.75,-4.445) 10(4.75,-3.175) 11(4.75,-1.905) 12(4.75,-0.635) 13(4.75,0.635) 14(4.75,1.905) 15(4.75,3.175) 16(4.75,4.445)
  silkscreen extent -4.88,-5.25 3.4,5.42, body extent -5.16,-5.25 5.16,5.25, height 2.65
SON40P300X80_HS-15L [mm] "SON, 14-Leads, Body 3.00x3.00mm, Pitch 0.40mm, Thermal Pad 2.30x1.69mm, IPC High Density"
  rect 0.7x0.2 smd mask+0.075: 1(-1.395,1.2) 2(-1.395,0.8) 3(-1.395,0.4) 4(-1.395,0) 5(-1.395,-0.4) 6(-1.395,-0.8) 7(-1.395,-1.2) 8(1.395,-1.2) 9(1.395,-0.8) 10(1.395,-0.4) 11(1.395,0) 12(1.395,0.4) 13(1.395,0.8) 14(1.395,1.2)
  rect 1.69x2.3 smd mask+0.075: 15(0,0)
  silkscreen extent -2,-1.7 1.55,1.75, body extent -1.5,-1.5 1.5,1.5, height 0.73
SON50P160X65_HS-9N [mm] "SON, 8-Leads, Body 2,10x1,60mm, Pitch 0,50mm, Thermal Pad 1,68x0,33mm, IPC Medium Density"
  rect 0.63x0.25 smd mask+0.05: 1(-0.765,0.75) 2(-0.765,0.25) 3(-0.765,-0.25) 4(-0.765,-0.75) 5(0.765,-0.75) 6(0.765,-0.25) 7(0.765,0.25) 8(0.765,0.75)
  rect 0.33x1.68 smd mask+0.05: 9(0,0)
  silkscreen extent -1.3,-1.25 0.85,1.3, body extent -0.85,-1.1 0.85,1.1, height 0.65
SON127P600X80_HS-9N [mm] "SON, 8-Leads, Body 5,00x6,00mm, Pitch 1,27mm, Thermal Pad 4,00x3,40mm, IPC Medium Density"
  rect 1.05x0.45 smd: 1(-2.815,1.905) 2(-2.815,0.635) 3(-2.815,-0.635) 4(-2.815,-1.905) 5(2.815,-1.905) 6(2.815,-0.635) 7(2.815,0.635) 8(2.815,1.905)
  rect 3x4 smd paste-1.7: 9(0,0)
  silkscreen extent -3.6,-2.65 3.15,2.7, body extent -3.5,-2.5 3.5,2.5, height 0.83
SON127P800X70_HS-9N [mm] "SON, 8-Leads, Body 6,00x8,00mm, Pitch 1,27mm, Thermal Pad 4,30x3,40mm, IPC Medium Density"
  rect 0.95x0.45 smd: 1(-3.87,1.905) 2(-3.87,0.635) 3(-3.87,-0.635) 4(-3.87,-1.905) 5(3.87,-1.905) 6(3.87,-0.635) 7(3.87,0.635) 8(3.87,1.905)
  rect 3.4x4.3 smd paste-1.7: 9(0,0)
  silkscreen extent -4.65,-3.2 4.2,3.25, body extent -4.05,-3.05 4.05,3.05, height 0.7
SOT0P254X110-2N [mm] "SOT223, 2-Leads, Body 1,45x2,55mm (avg), Pitch 0,00mm, IPC Medium Density"
  rect 0.8x0.5 smd: 1(-1.35,0) 2(1.35,0)
  silkscreen extent -1.47,-0.75 0.65,0.92, body extent -1.3,-0.68 1.3,0.68, height 1.1
SOT23_N [mm] "SOT23, 3-Leads, Body 2.9x1.3mm, Pitch 0.95mm, Lead Span 2.3mm, IPC Medium Density"
  rect 1.3x0.6 smd: 1(-1.05,0.95) 2(-1.05,-0.95) 3(1.05,0)
  silkscreen extent -1.17,-1.5 0.7,1.92, body extent -1.25,-1.46 1.23,1.46, height 1
SOT65P210X110-6L [mm] "SOT23, 6-Leads, Body 2.00x2.10mm, Pitch 0.65mm, IPC High Density"
  rect 0.65x0.4 smd: 1(-1.025,0.65) 2(-1.025,0) 3(-1.025,-0.65) 4(1.025,-0.65) 5(1.025,0) 6(1.025,0.65)
  silkscreen extent -1.15,-1.1 0.3,1.52, body extent -1.2,-1.07 1.2,1.07, height 1.1
TO263-7EP [mm] "Variable Step Down Regulator Module, body 9.85x10.16"
  rect 3.06x0.89 smd: 1(-7.66,3.81) 2(-7.66,2.54) 3(-7.66,1.27) 4(-7.66,0) 5(-7.66,-1.27) 6(-7.66,-2.54) 7(-7.66,-3.81)
  rect 8.54x5.35 smd paste-403.566: 8(-0.355,0)
  silkscreen extent -4.92,-5.08 4.92,5.08, body extent -8.84,-5.08 4.92,5.08, height 4.77
TSOP65P280X110-8N [mm] "TSOP, 8-Leads, Body 2,90x1,60mm, Pitch 0,65mm, IPC Medium Density"
  oval 1x0.35 smd: 1(-1.35,0.975) 2(-1.35,0.325) 3(-1.35,-0.325) 4(-1.35,-0.975) 5(1.35,-0.975) 6(1.35,-0.325) 7(1.35,0.325) 8(1.35,0.975)
  silkscreen extent -1.48,-1.5 0.45,1.9, body extent -1.4,-1.5 1.4,1.5, height 1.1
TSOP65P490X110-8L [mm] "TSOP, 8-Leads, Body 3,00x3,00mm, Pitch 0,65mm, IPC High Density"
  oval 1.15x0.35 smd mask+0.05: 1(-2.125,0.975) 2(-2.125,0.325) 3(-2.125,-0.325) 4(-2.125,-0.975) 5(2.125,-0.975) 6(2.125,-0.325) 7(2.125,0.325) 8(2.125,0.975)
  silkscreen extent -1.15,-1.55 1.15,2.6, body extent -2.45,-1.55 2.45,1.55, height 1.1
TSQFP50P900X900X160-48N [mm] "TSQFP, 48-Leads, Body 7,00x7,00mm, Pitch 0,50mm, IPC Medium Density"
  oval 1.4x0.3 smd: 1(-4.2,2.75) 2(-4.2,2.25) 3(-4.2,1.75) 4(-4.2,1.25) 5(-4.2,0.75) 6(-4.2,0.25) 7(-4.2,-0.25) 8(-4.2,-0.75) 9(-4.2,-1.25) 10(-4.2,-1.75) 11(-4.2,-2.25) 12(-4.2,-2.75) 25(4.2,-2.75) 26(4.2,-2.25) 27(4.2,-1.75) 28(4.2,-1.25) 29(4.2,-0.75) 30(4.2,-0.25) 31(4.2,0.25) 32(4.2,0.75) 33(4.2,1.25) 34(4.2,1.75) 35(4.2,2.25) 36(4.2,2.75)
  oval 0.3x1.4 smd: 13(-2.75,-4.2) 14(-2.25,-4.2) 15(-1.75,-4.2) 16(-1.25,-4.2) 17(-0.75,-4.2) 18(-0.25,-4.2) 19(0.25,-4.2) 20(0.75,-4.2) 21(1.25,-4.2) 22(1.75,-4.2) 23(2.25,-4.2) 24(2.75,-4.2) 37(2.75,4.2) 38(2.25,4.2) 39(1.75,4.2) 40(1.25,4.2) 41(0.75,4.2) 42(0.25,4.2) 43(-0.25,4.2) 44(-0.75,4.2) 45(-1.25,4.2) 46(-1.75,4.2) 47(-2.25,4.2) 48(-2.75,4.2)
  silkscreen extent -4.32,-3.1 3.1,3.57, body extent -4.5,-4.5 4.5,4.5, height 1.6
USB2.5-2H4D [mm] "Connector; USB1.1, Type B, Thru-Hole; 4 Position; Right Angle"
  rect 1.6x1.6 hole 0.92: 1(-1,1.25)
  round 1.6 hole 0.92: 2(-1,-1.25) 3(1,-1.25) 4(1,1.25)
  round 3.8 hole 2.3: 5(3.71,6.02) 5(3.71,-6.02)
  silkscreen extent -3.18,-6.02 13.99,6.02, body extent -3,-7.4 14,7.48, height 11
"WB-02 (MW-2M) PITCH 2.00MM" [mm]
  rect 1.3x1.3 hole 0.8: 1(0,0)
  round 1.3 hole 0.8: 2(2,0)
  silkscreen extent -2.1,-3 4.1,1.9, body extent -2,-2.9 4,1.75, height 6.12
WQFN-13 [mm] "3.00 mm × 2.00 mm"
  rrect50% 0.65x0.25 smd mask+0.05: 1(-0.87,1.15) 2(-0.87,0.5) 3(-0.87,0) 4(-0.87,-0.5) 5(-0.875,-1.155) 7(0.87,-1.155) 8(0.87,-0.5) 9(0.87,0) 10(0.87,0.5) 11(0.875,1.155)
  rrect50% 0.25x0.65 smd mask+0.05: 1(-0.65,1.375) 5(-0.65,-1.375) 7(0.65,-1.38) 11(0.65,1.375)
  rrect50% 0.35x0.65 smd mask+0.05: 6(0,-1.375) 12(0,1.375)
  round 0.4 hole 0.2 mask+0.05: 13(0,-0.5) 13(0,0) 13(0,0.5)
  rect 0.45x1.45 smd mask+0.05: 13(0,0)
  silkscreen extent -1.62,1.88 -1.37,2.12, body extent -1,-1.5 1,1.5, height 0.7
XT30UPB-M [mm]
  round 4 hole 2: 1(-2.5,0) 2(2.5,0)
  silkscreen extent -5.23,-2.73 5.28,2.75, body extent -5.07,-2.6 5.13,2.6, height 9.4
XTAL_ASFLMB-33.333MHZ-LC-T [mm]
  rect 1.1x1.2 smd: 1(-1.15,1.27) 2(-1.15,-1.27) 3(1.15,-1.27) 4(1.15,1.27)
  silkscreen extent -2.35,-2.5 1.6,2.5, body extent -1.6,-2.47 1.6,2.53, height 0.86

## Part data
A1: library part "Модуль AM1/4S-0505SZ", "0.25 Watt", Manufacturer=flex, ComponentLink1Description=datasheet, ComponentLink1URL=http://www.aimtec.com/site/Aimtec/files/Datasheet/HighResolution/AM1_4S-Z.pdf?ft4=0-357
BQ1: library part "Кварц ABM10-25.000MHZ-D30", "Резонатор кварцевый", Manufacturer=ABRACON, Tolerance="±20 ppm"
BQ2: library part "Кварц ABM10AIG-24.000MHZ-4Z-T3", "Резонатор кварцевый", Manufacturer=ABRACON, Tolerance="±50 ppm"
C1 C8 C9 C10 C30 C33 C34 C35 C36 C39 C40 C41 C43 C49 C76 C82 C87 C95 C98 C131 C327 C355 C356 C?: library part "Кер.ЧИП конд. 0805 22мкФ X5R 10% 16В", "Кер. ЧИП-конденсатор", Manufacturer=TDK, ManufacturerPartNumber=C2012X5R1C226KT, Power/Voltage=16В, Tolerance=±10%, TKE=X5R
C2: library part "Конденсатор гибридный SMD 33мкФ ±20% 50В", "Гибридный ЧИП-конденсатор", Manufacturer=Panasonic, ManufacturerPartNumber=EEHZC1H330XP, Power/Voltage=50В, Tolerance=±20%, LatestRevisionDate=29-May-2009, LatestRevisionNote="IPC-7351 Footprint Added.", PackageDescription="ZC Series - Anti-Vibration", PackageReference="ZC Series", Published=8-Jun-2000, Publisher="Altium Limited"
C4 C? C?: library part "Кер.ЧИП конд. 1210 10мкФ X5R 20% 50В", "Кер. ЧИП-конденсатор", Manufacturer=Murata, ManufacturerPartNumber=GRM32ER71H106, Power/Voltage=50В, Tolerance=±20%, TKE=X5R
C5 C11 C15 C16 C17 C20 C24 C27 C28 C29 C32 C38 C46 C47 C51 C53 C55 C56 C57 C59 C60 C61 C62 C63 C64 C65 C66 C67 C68 C69 C71 C75 C78 C81 C83 C90 C91 C92 C93 C94 C96 C97 C99 C100 C101 C102 C103 C104 C105 C110 C111 C112 C113 C114 C116 C117 C118 C119 C120 C121 C122 C123 C124 C125 C126 C127 C130 C132 C133 C134 C135 C136 C138 C139 C140 C142 C143 C147 C148 C149 C150 C151 C152 C153 C154 C155 C156 C157 C158 C159 C166 C168 C170 C171 C172 C177 C179 C180 C185 C196 C202 C203 C208 C215 C222 C223 C224 C225 C226 C227 C236 C237 C246 C247 C248 C251 C252 C253 C260 C261 C262 C263 C264 C265 C266 C267 C269 C272 C275 C276 C282 C285 C289 C290 C291 C294 C295 C346 C359 C?: library part "Кер.ЧИП конд. 0402 0.1мкФ X7R 10%, 16В", "Кер. ЧИП-конденсатор", Power/Voltage=16В, Tolerance=±10%, PackageReference=0402, TKE=X7R
C12: library part "Кер.ЧИП конд. 0402 0.022мкФ X7R 10%, 50В", "Кер. ЧИП-конденсатор", Power/Voltage=50В, Tolerance=±20%, TKE=X7R
C13 C26 C77 C79 C80 C88 C106 C107 C108 C109 C115 C128 C183 C190 C191 C193 C228 C229 C230 C231 C268 C278 C292 C331 C332 C334 C341 C342 C344 C345 C?: library part "Кер.ЧИП конд. 0402 1мкФ X5R 10%, 10В", "Кер. ЧИП-конденсатор", Power/Voltage=10В, Tolerance=±10%, PackageReference=0402, TKE=X5R
C18 C21 C22 C23 C89 C129: library part "Кер.ЧИП конд. 0402 8200пФ X7R 10%, 50В", "Кер. ЧИП-конденсатор", Power/Voltage=50В, Tolerance=±20%, TKE=X7R
C19 C42 C45 C48 C50 C182 C217 C219 C270 C284: library part "Кер.ЧИП конд. 1206 100мкФ X5R 20% 6.3В", "Кер. ЧИП-конденсатор", Manufacturer=Murata, ManufacturerPartNumber=GRM31CR60J107ME39L, Power/Voltage=6.3В, Tolerance=±20%, TKE=X5R
C25: library part "Конденсатор гибридный SMD 390мкФ ±20% 2.5В", "Aluminum Organic Polymer Capacitor", Manufacturer=Panasonic, ManufacturerPartNumber=EEHZC1H330XP, Power/Voltage=2.5В, Tolerance=±20%, LatestRevisionDate=29-May-2009, LatestRevisionNote="IPC-7351 Footprint Added.", PackageDescription="ZC Series - Anti-Vibration", PackageReference="ZC Series", Published=8-Jun-2000, Publisher="Altium Limited"
C37 C347 C348 C350 C351 C353 C354: library part "Кер.ЧИП конд. 0805 4,7мкФ X5R 20% 16В", "Кер. ЧИП-конденсатор", Manufacturer=Murata, ManufacturerPartNumber=GRM21BR61A476ME15L, Power/Voltage=16В, Tolerance=±20%, TKE=X5R
C84 C85 C173 C287: library part "Кер.ЧИП конд. 0402 1000пФ NP0 5%, 50В", "Кер. ЧИП-конденсатор", Power/Voltage=50В, Tolerance=±5%, PackageReference=0402, TKE=NPO
C86 C162 C163 C164 C165 C195 C201 C209 C273: library part "Кер.ЧИП конд. 0402 0.01мкФ X7R 10%, 50В", "Кер. ЧИП-конденсатор", Power/Voltage=50В, Tolerance=±20%, TKE=X7R
C144 C145 C160 C161 C167 C169 C174 C178 C184 C194 C200 C212 C220 C221 C232 C233 C242 C245 C256 C259 C271 C274 C286 C288: library part "Кер.ЧИП конд. 0603 10мкФ X5R 20% 6.3В", "Кер. ЧИП-конденсатор", Manufacturer=Murata, ManufacturerPartNumber=GRM188R61A106KE69D, Power/Voltage=6.3В, Tolerance=±20%, TKE=X5R
C146 C192 C234 C235 C280 C293: library part "Кер.ЧИП конд. 0805 47мкФ X5R 20% 10В", "Кер. ЧИП-конденсатор", Manufacturer=Murata, ManufacturerPartNumber=GRM21BR61A476ME15L, Power/Voltage=10В, Tolerance=±20%, TKE=X5R
C175 C176 C240 C241 C243 C244 C296 C298 C301 C303: library part "Кер.ЧИП конд. 0402 10пФ NPO 5%, 50В", "Кер. ЧИП-конденсатор", Power/Voltage=50В, Tolerance=±5%, PackageReference=0402, TKE=NPO
C181 C349 C357 C358: library part "Кер.ЧИП конд. 0603 0.1мкФ X7R 10% 50В", "Кер. ЧИП-конденсатор", Manufacturer=Murata, ManufacturerPartNumber=GRM188R71H104KA93D, Power/Voltage=50В, Tolerance=±10%, TKE=X7R
C186 C187 C188 C189 C198 C199: library part "Кер.ЧИП конд. 0402 100пФ NPO 5%, 50В", "Кер. ЧИП-конденсатор", Power/Voltage=50В, Tolerance=±5%, PackageReference=0402, TKE=NPO
C197 C254 C255 C257 C258: library part "Кер.ЧИП конд. 0402 2.2мкФ X5R 20%, 6.3В", "Кер. ЧИП-конденсатор", Power/Voltage=6.3В, Tolerance=±20%, PackageReference=0402, TKE=X5R
C204 C205 C321 C322: library part "Кер.ЧИП конд. 0402 56пФ NPO 5%, 50В", "Кер. ЧИП-конденсатор", Power/Voltage=50В, Tolerance=±5%, PackageReference=0402, TKE=NPO
C206 C207: library part "Кер.ЧИП конд. 0402 13пФ NPO 5%, 50В", "Кер. ЧИП-конденсатор", Power/Voltage=50В, Tolerance=±5%, PackageReference=0402, TKE=NPO
C210 C211: library part "Кер.ЧИП конд. 0402 91пФ NPO 5%, 50В", "Кер. ЧИП-конденсатор", Power/Voltage=50В, Tolerance=±5%, PackageReference=0402, TKE=NPO
C213 C214: library part "Кер.ЧИП конд. 0402 43пФ NPO 5%, 50В", "Кер. ЧИП-конденсатор", Power/Voltage=50В, Tolerance=±5%, PackageReference=0402, TKE=NPO
C216 C218 C249 C250: library part "Кер.ЧИП конд. 0402 39пФ NPO 5%, 50В", "Кер. ЧИП-конденсатор", Power/Voltage=50В, Tolerance=±5%, PackageReference=0402, TKE=NPO
C238 C239 C306 C318 C319: library part "Кер.ЧИП конд. 0402 30пФ NPO 5%, 50В", "Кер. ЧИП-конденсатор", Power/Voltage=50В, Tolerance=±5%, PackageReference=0402, TKE=NPO
C277 C279 C281 C283: library part "Кер.ЧИП конд. 0402 51пФ NPO 5%, 50В", "Кер. ЧИП-конденсатор", Power/Voltage=50В, Tolerance=±5%, PackageReference=0402, TKE=NPO
C297 C299 C315: library part "Кер.ЧИП конд. 0402 18пФ NPO 5%, 50В", "Кер. ЧИП-конденсатор", Power/Voltage=50В, Tolerance=±5%, PackageReference=0402, TKE=NPO
C307: library part "Кер.ЧИП конд. 0402 8.2пФ C0G, 50В", "Кер. ЧИП-конденсатор", Power/Voltage=50В, Tolerance=±5%, TKE=C0G
C308 C309: library part "Кер.ЧИП конд. 0402 36пФ NPO 5%, 50В", "Кер. ЧИП-конденсатор", Power/Voltage=50В, Tolerance=±5%, PackageReference=0402, TKE=NPO
C312 C313: library part "Кер.ЧИП конд. 0402 15пФ NPO 5%, 50В", "Кер. ЧИП-конденсатор", Power/Voltage=50В, Tolerance=±5%, PackageReference=0402, TKE=NPO
C314: library part "Кер.ЧИП конд. 0402 82пФ NPO 5%, 50В", "Кер. ЧИП-конденсатор", Power/Voltage=50В, Tolerance=±5%, PackageReference=0402, TKE=NPO
C316 C317: library part "Кер.ЧИП конд. 0402 120пФ NPO 5%, 50В", "Кер. ЧИП-конденсатор", Power/Voltage=50В, Tolerance=±5%, PackageReference=0402, TKE=NPO
C320: library part "Кер.ЧИП конд. 0402 47пФ NPO 5%, 50В", "Кер. ЧИП-конденсатор", Power/Voltage=50В, Tolerance=±5%, PackageReference=0402, TKE=NPO
C352: library part "Конденсатор керамический защищенный 1000pF 250V AC (DE1E3KX102MA4BN01F)", "Защищенные конденсаторы 1000pF 250Vrms 20% L/S=10mm Bulk long", Manufacturer=MURATA, ManufacturerPartNumber=DE1E3KX102MA4BN01F, Power/Voltage=250VAC, Tolerance=±10%, LatestRevisionDate=17-Jul-2002, LatestRevisionNote="Re-released for DXP Platform.", PackageReference="Type KX Small Size", Published=8-Jun-2000, Publisher="Altium Limited", TKE=X1Y1
C?: library part "Конденсатор танталовый SMD D case 47мкФ ±10% 25B", "Тант. ЧИП-конденсатор", Power/Voltage=25В, Tolerance=±10%, LatestRevisionDate=29-May-2009, LatestRevisionNote="IPC-7351 Footprint Added.", PackageDescription="Chip Capacitor", PackageReference="тип D", Published=8-Jun-2000, Publisher="Altium Limited"
D1: library part "Микросхема W25Q256JVEIQ", "3V 256M-BIT SERIAL FLASH MEMORY WITH DUAL/QUAD SPI", Manufacturer=WINBOND
D2: library part "Микросхема 25CSM04-I/MF", "4-Mbit SPI Serial EEPROM with 128-Bit Serial Number and Enhanced Write Protection", Manufacturer=MICROCHIP, ComponentLink1Description=Datasheet, ComponentLink1URL=https://ww1.microchip.com/downloads/en/DeviceDoc/25CSM04-4-Mbit-SPI-Serial-EEPROM-With-128-Bit-Serial-Number-and-Enhanced-Write-Protection-20005817C.pdf
DA2 DA5 DA6 DA7 DA10 DA11: library part "Микросхема TPS563210A", "TPS56x210A, 4.5-V to 17-V Input, 2-A, 3-A Synchrono", Manufacturer=TI
DA3: library part "Микросхема WPMDM1500602JT / 171050601", "MagI3C Power Module VDRM – Variable Step Down Regulator Module", Manufacturer="Würth Elektronik", ComponentLink1Description=datasheet, ComponentLink1URL=https://katalog.we-online.de/pm/datasheet/171050601.pdf
DA8 DA9: library part "ЧИП защитный диод PSD15C", "HIGH POWERED TVS", Manufacturer=PROTEK, Power/Voltage=15В, ComponentLink1Description=datasheet, ComponentLink1URL=https://www.protekdevices.com/xyz/documents/datasheets/psd.pdf
DA12: library part "Сборка трансформаторов 749020023A", "1000BASE-T Magnetics Module", Manufacturer="Wurth Elektronik"
DA13 DA16 DA17 DA20 DA21: library part "Микросхема TPS7A4700RGW", "36-V, 1-A, 4-µVRMS, RF LDO Voltage Regulator", Manufacturer=TI, ComponentLink1Description=datasheet, ComponentLink1URL=http://www.ti.com/lit/ds/symlink/tps7a47.pdf
DA14 DA15: library part "Микросхема PE4312C-Z", "RF Digital Step Attenuator 6-bit, 31.5 dB, 1 MHz–4 GHz", Manufacturer=Peregrine, ComponentLink1Description=datasheet, ComponentLink1URL=https://www.psemi.com/pdf/datasheets/pe4312ds.pdf
DA18 DA19: library part "Микросхема LTC6401IUD-14", "2GHz Low Noise, Low  Distortion Differential ADC  Driver for DC-140MHz", Manufacturer="LINEAR TECHNOLOGY", ComponentLink1Description=datasheet, ComponentLink1URL=http://cds.linear.com/docs/en/datasheet/640114f.pdf
DA?: library part "Микросхема LM60440DRPKR", "3.8-V to 36-V, 4-A Ultra-Small Synchronous Step-Down Converter", ComponentLink1Description=datasheet, ComponentLink1URL=https://www.ti.com/lit/ds/symlink/lm60440.pdf?HQS=dis-dk-null-digikeymode-dsf-pf-null-wwe&ts=1663282176250&ref_url=https%253A%252F%252Fwww.digikey.si%252F
DD1: library part "Микросхема XC7Z020-2CLG484I", "Zynq®-7000 SoC Family", Manufacturer=XILINX, ComponentLink1Description=datasheet, ComponentLink1URL=https://www.xilinx.com/support/documentation/data_sheets/ds925-zynq-ultrascale-plus.pdf
DD2 DD3: library part "Микросхема MAX13433EETD+", "RS-422 Transceivers with Low-Voltage Logic Interface 16M", Manufacturer=Maxim, ComponentLink1Description=datasheet, ComponentLink1URL=https://datasheets.maximintegrated.com/en/ds/MAX13430E-MAX13433E.pdf
DD4: library part "Микросхема ISO3080DWR", "ISOLATED 5-V FULL DUPLEX RS-485 TRANSCEIVERS 200 kbps", Manufacturer=TI
DD5: library part "Микросхема SN74LVC2G14DCKR", "Dual Schmitt-Trigger Inverter", Manufacturer=TI, ComponentLink1Description=datasheet, ComponentLink1URL=http://www.ti.com/lit/ds/symlink/sn74auc1g04.pdf
DD6: library part "Микросхема MT41K256M16TW-107", "4Gb, x16, 1.35V DDR3L", Manufacturer=Micron, Op. Temp.="0C to +95C", Package=FBGA, PartNumber=MT41K128M16JT-125, Voltage=1.35V, CL="CL = 13", Clock Rate="667 MHz", ComponentLink1Description="Manufacturer URL", ComponentLink1URL=http://www.micron.com/, ComponentLink2Description=Datasheet, ComponentLink2URL=http://www.micron.com/~/media/Documents/Products/Data%20Sheet/DRAM/2Gb_DDR3_SDRAM.pdf, ComponentLink3Description="Package Specification", ComponentLink3URL=http://www.micron.com/~/media/Documents/Products/Data%20Sheet/DRAM/2Gb_DDR3_SDRAM.pdf, Cycle Time=1.07ns, Data Rate=DDR3-1866, DatasheetVersion=Rev.F, Density=2Gb, Depth=256M16, Mounting Technology="Surface Mount", PackageDescription="96-Ball Fine-Pitch Ball Grid Array, 14 x 8 mm, Pitch 0.8 mm", PackageReference=MICT-JT-96, PackageVersion=Rev.G, Pin Count=96-ball, RoHS=Yes, Width=x16
DD7: library part "Микросхема KSZ9031RNXIC", "Gigabit Ethernet Transceiver with Power Saving Features", Built_By=EMA_Cory, Copyright="Copyright (C) 2018 Accelerated Designs. All rights reserved", Datasheet=https://ww1.microchip.com/downloads/en/DeviceDoc/00002117F.pdf, Manufacturer_Part_Number=KSZ9031RNXIC, RefDes=RefDes, SourceLibrary=Add_to_database_2020-10-19, TYPE=DEV, Vendor=Microchip
DD8: library part "Микросхема DAC8571IDGKR", "16-BIT, LOW POWER, VOLTAGE OUTPUT, I2C INTERFACE DIGITAL-TO-ANALOG  CONVERTER", Manufacturer=TI, ComponentLink1Description=datasheet, ComponentLink1URL=http://www.ti.com/lit/ds/slas373a/slas373a.pdf
DD9: library part "Микросхема ADCLK944BCPZ", "2.5 V/3.3 V, Four LVPECL Outputs,  SiGe Clock Fanout Buffer", Manufacturer=TI, ComponentLink1Description=datasheet, ComponentLink1URL=http://www.analog.com/media/en/technical-documentation/data-sheets/ADCLK944.pdf
DD10 DD11: library part "Микросхема LTC2208CUP", "16-Bit, 130Msps ADC", Manufactured=Linear, ComponentLink1Description=datasheet, ComponentLink1URL=https://www.analog.com/media/en/technical-documentation/data-sheets/2208fc.pdf
DD12: library part "Микросхема AD9783BCPZ", "Dual 12-/14-/16-Bit, LVDS Interface, 500 MSPS DACs", Manufacturer=AD, ComponentLink1Description=datasheet, ComponentLink1URL=http://www.analog.com/media/en/technical-documentation/data-sheets/AD9780_9781_9783.pdf
DD13: library part "Микросхема CP2102N-A02-GQFN28", "Single-Chip USB-to-UART Data Transfer", Manufacturer="Silicon Labs", ComponentLink1Description=datasheet, ComponentLink1URL=https://www.silabs.com/documents/public/data-sheets/cp2102n-datasheet.pdf
DD14: library part "Микросхема NAU8822AYG", "24-bit Stereo Audio Codec with Speaker Driver", Manufacturer=NUVOTON
DD15: library part "Микросхема ADuM3160", "Full/Low Speed 2.5 kV USB Digital Isolator", Manufacturer=AD, ComponentLink1Description=datasheet, ComponentLink1URL=https://www.analog.com/media/en/technical-documentation/data-sheets/ADuM5210_5211_5212.pdf
DD16: library part "Микросхема HS-100B", "A Highly Integrated USB Audio Single Chip", Manufacturer=Cmedia, ComponentLink1Description=datasheet
DD17: library part "Микросхема USB2422I-MJ", "2-Port USB 2.0 Hi-Speed Hub Controller", Manufacturer=Microchip, ComponentLink1Description=datasheet, ComponentLink1URL=https://ww1.microchip.com/downloads/en/devicedoc/00001726b.pdf
F1 F3: library part "Чип предохранитель 0ZCM0002FF2G", "ЧИП-резистор", Manufacturer=Belfuse, ManufacturerPartNumber=0ZCM0002FF2G, PackageReference=0603
G1: library part "Генератор кварцевый ASFLMB-33.333MHZ", "33.333 MHz HCMOS/TTL Clock Oscillator", Manufacturer=Abracom
G2: library part "Генератор кварцевый CVHD-950-122.880", "122.88 MHz Ultra-Low Phase Noise Oscillator", Manufacturer="Crystek crystals", ComponentLink1Description=datasheet, ComponentLink1URL=http://www.rakon.com/products/families/tcxo
HL1: library part "Светодиод SMD FYLS-0603UGC (зеленый)", "ЧИП-светодиод", Manufacturer=FORYARD, ManufacturerPartNumber=FYLS-0603UGC, PackageDocument="revH, May-2002", ComponentLink1Description="Manufacturer Link", ComponentLink1URL=http://www.irf.com/, ComponentLink2Description=Datasheet, ComponentLink2URL=http://www.irf.com/product-info/datasheets/data/10MQ060N.pdf, DatasheetDocument=May-2002, PackageReference=0603, Published=17-Sep-2003, Publisher="Altium Limited"
L1 L4 L5 L6 L7 L15 L16 L22 L24 L31 L32 L39 L40 L45 L47 L58 L59 L61 L62: library part "ЧИП индуктивность CSAB0420-2R2M", "Molding Power Choke", Manufacturer=Vishay, ManufacturerPartNumber=IHLP1616ABER1R0M11
L3 L8 L9 L10 L11 L12 L13 L17 L18 L19 L20 L21 L23 L25 L27 L29 L30 L35 L36 L37 L38 L46 L48 L49 L56 L57 L60: library part "ЧИП дроссель 0603 BLM18PG121SN1D", "SMD EMI Suppression Filter EMIFIL", Manufacturer=Murata, ManufacturerPartNumber=BLM18PG121SN1D
L14 L63: library part "ЧИП синфазный фильтр 0805 EXC34CE900U", "Common Mode Noise Filters EXC34CG/CE type", Manufacturer=Panasonic, ComponentLink1Description=datasheet, ComponentLink1URL=https://industrial.panasonic.com/cdbs/www-data/pdf/AWE0000/AWE0000C276.pdf, ManufacturerPartNumber=EXC34CE900U
L26 L28: library part "ЧИП индуктивность 0805CS-151XGL"
L33 L34: library part "ЧИП индуктивность 0805CS-111XGL"
L41 L42 L43 L44: library part "ЧИП индуктивность 0805CS-150XJL"
L50 L53: library part "ЧИП индуктивность 0805CS-181XGL"
L51 L52 L54 L55: library part "ЧИП индуктивность 0805CS-221XGL"
L?: library part "ЧИП индуктивность XAL5030-562MEB", "Shielded Power Inductor – XAL5030", Manufacturer=Сoilcraft, ManufacturerPartNumber=XAL5030-222MEB
R2 R51 R62: library part "Чип резистор 0402 10 кОм, 1%", "ЧИП-резистор", Tolerance=±5%, PackageReference=0402, TKE="100 ppm/°С"
R4: library part "Чип резистор 0402 2,7 кОм, 5%", "ЧИП-резистор", Tolerance=±5%, PackageReference=0402, TKE="100 ppm/°С"
R7: library part "Чип резистор 0402 22 кОм, 5%", "ЧИП-резистор", Tolerance=±5%, PackageReference=0402, TKE="100 ppm/°С"
R8 R9 R16 R18 R20 R21 R27 R28 R29 R30 R59 R64 R71 R72 R73 R74 R77 R88 R91 R94 R95 R96 R97 R146 R161 R162: library part "Чип резистор 0402 10 кОм, 5%", "ЧИП-резистор", Tolerance=±5%, PackageReference=0402, TKE="100 ppm/°С"